# Altium PCB ldo_pcb.PcbDoc
Units mil, origin at the board's own origin, x right, y up, seen from the top; angles counter-clockwise.
Board outline 1437.01 x 393.7 mil, 2 copper layers (Top Layer, Bottom Layer); 11 components, 5 nets, 24 pads, 19 vias.
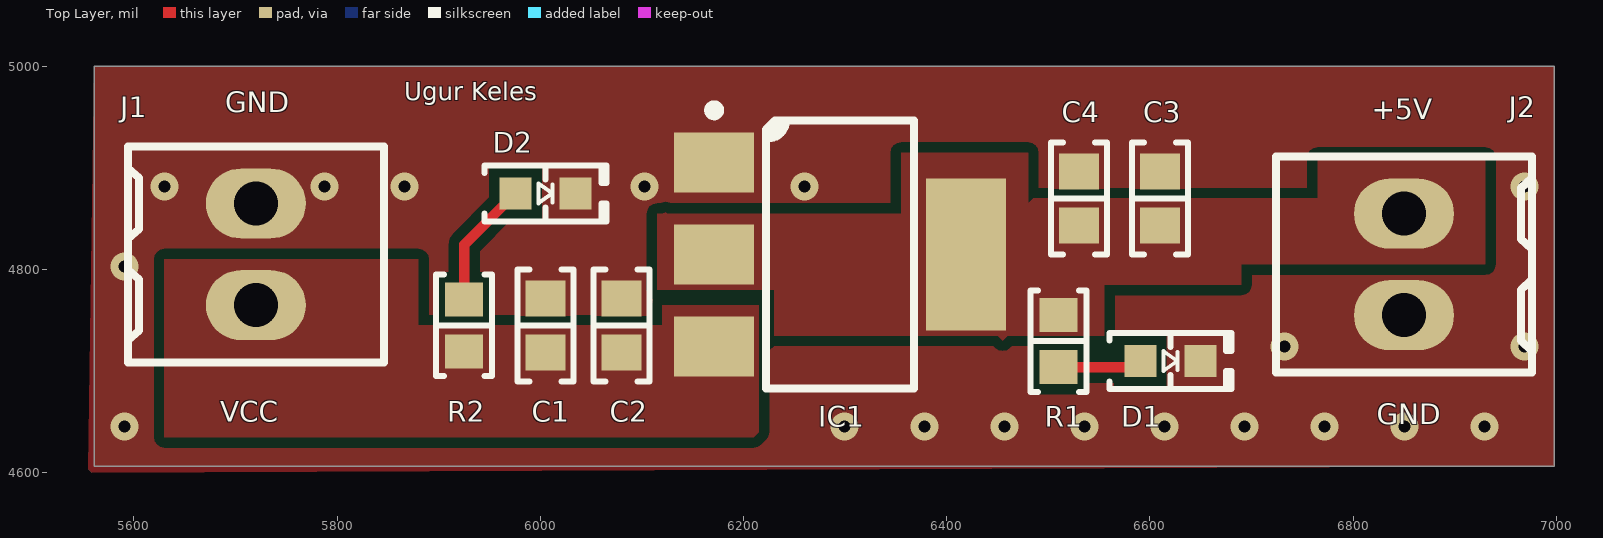
[diagram p0: Top Layer view]
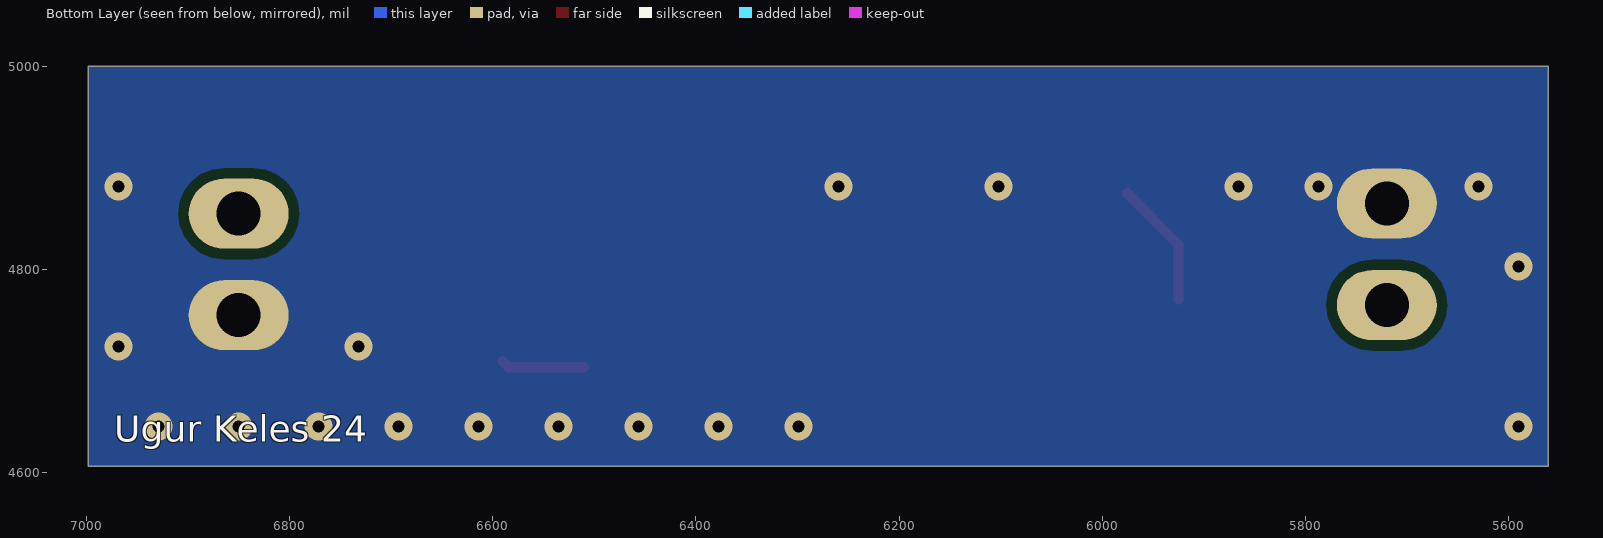
[diagram p1: Bottom Layer view, seen from below]
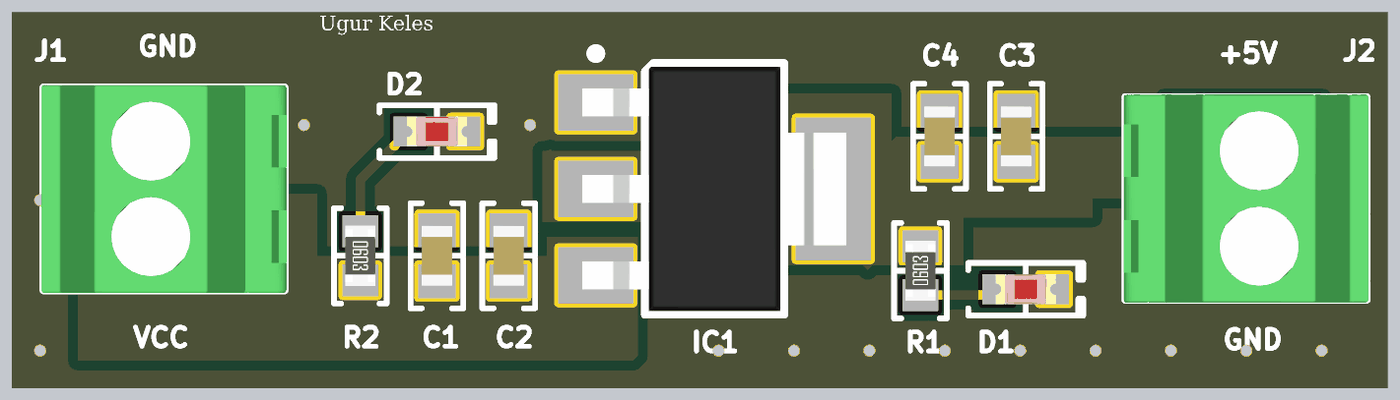
[diagram p2: 3D render of the assembled board from above, using the file's embedded part models]

## Layer stack, top to bottom
Top Solder: solder mask 0.4, Solder Resist, Dk 3.5
Top Layer: signal copper 1.4
Dielectric 1: dielectric 12.6, FR-4, Dk 4.8
Bottom Layer: signal copper 1.4
Bottom Solder: solder mask 0.4, Solder Resist, Dk 3.5

## Board outline
5561.02,4606.3 5561.02,5000 6998.03,5000 6998.03,4606.3

## Design rules (kind name [scope] priority, off if disabled: settings)
Clearance [All] p1: gap=10 ignorepadtopadclearanceinfootprint=FALSE
MinimumSolderMaskSliver [All] p1: minsoldermaskwidth=7.09
PolygonConnect [All] p1: connectstyle=Direct reliefconductorwidth=10 reliefentries=4 polygonreliefangle="90 Angle" airgapwidth=10
RoutingVias [All] p1: holewidth=28 width=50 viastyle="Through Hole" minholewidth=28 minwidth=50 maxholewidth=28 maxwidth=50
SilkToSilkClearance [All] p1: silktosilkclearance=5.91
SilkToSolderMaskClearance [IsPad] p1: minsilkscreentomaskgap=3.94 clearancetoexposedcopper=TRUE
SolderMaskExpansion [All] p1: expansion=4 istentingtop=FALSE
Width [All] p1: maxlimit=10 minlimit=10 preferedwidth=10
27 further rules are at their usual default settings.

## Components (designator, comment, footprint, x,y, rotation, side; value= is the part's Value field where it differs from the comment)
C1 "10 µF" "CAP 0603_1608" 6005,4745 r270 top
C2 "0.1 µF" "CAP 0603_1608" 6080,4745 r270 top
C3 "10 µF" "CAP 0603_1608" 6610,4870 r270 top
C4 "0.1 µF" "CAP 0603_1608" 6530,4870 r270 top
D1 "=Value" "LED 0603_1608 RED" 6620,4710 r0 top
D2 "=Value" "LED 0603_1608 RED" 6005,4875 r0 top
IC1 "LD1117S50TR" "ST SOT-223" 6295,4815 r0 top
J1 "282834-2" "TE 282834-2" 5720,4815 r90 top
J2 "282834-2" "TE 282834-2" 6850,4805 r270 top
R1 "330 Ohms" "RES 0603_1608" 6510,4729.41 r90 top
R2 "1 kOhms" "RES 0603_1608" 5925,4745 r270 top

## Footprints (in the part's own frame and the unit in brackets; to place one, negate y for a bottom-side part, rotate by r counter-clockwise, add the part's x,y. Pads: shape width x height; smd on the part's side, far side on the other; paste and mask are expansions set on the pad)
"CAP 0603_1608" [mm] "Chip Capacitor, 2-Leads, Body 1.60x0.80mm, IPC Medium Density"
  rect 0.9x1 smd: 1(-0.675,0) 2(0.675,0)
  silkscreen extent -1.4,-0.7 1.4,0.7, body extent -0.8,-0.41 0.8,0.41, height 0.82
"LED 0603_1608 RED" [mm] "Chip Diode, 2-Leads, Body 1.60x0.80mm, IPC Medium Density"
  rect 0.8x0.8 smd: 1(-0.75,0) 2(0.75,0)
  silkscreen extent -1.52,-0.7 1.52,0.7, body extent -0.8,-0.4 0.8,0.4, height 0.53
"RES 0603_1608" [mm] "Chip Resistor, 2-Leads, Body 1.60x0.80mm, IPC Medium Density"
  rect 0.85x0.95 smd: 1(-0.65,0) 2(0.65,0)
  silkscreen extent -1.27,-0.7 1.27,0.7, body extent -0.8,-0.4 0.8,0.4, height 0.45
"ST SOT-223" [mm] "SOT223, 4-Leads, Body 6.50x7.00mm (avg), Pitch 2.30mm, IPC Medium Density"
  rect 2x1.5 smd: 1(-3.15,2.3) 2(-3.15,0) 3(-3.15,-2.3)
  rect 2x3.8 smd: 4(3.15,0)
  silkscreen extent -3.27,-3.35 1.85,3.72, body extent -3.52,-3.25 3.5,3.25, height 1.8
"TE 282834-2" [mm]
  oval 1.75x2.5 hole 1.1: 1(-1.27,0) 2(1.27,0)
  silkscreen extent -2.7,-3.2 2.7,3.2, body extent -2.77,-3.25 2.77,3.25, height 10

## Part data
C1 C3: library part GRM188Z71A106MA73D, "CAP CER 10UF 10V X7R 0603", Part Number=GRM188Z71A106MA73D
C2 C4: library part 06031C104K4T2A, "CAP CER 0.1UF 100V X7R 0603", Part Number=06031C104K4T2A
D1 D2: library part APT1608SEC/J3-AMT, "LED RED 0603", Part Number=APT1608SEC/J3-AMT
IC1: "IC REG LINEAR 5V 800MA SOT223", Part Number=LD1117S50TR
J1 J2: "TERM BLK 2P SIDE ENT 2.54MM PCB", Part Number=282834-2
R1: library part AC0603FR-10330RL, "RES 330 OHM 1% 1/10W 0603", Part Number=AC0603FR-10330RL
R2: library part 3-2176366-6, "RES 1K OHM 0.1% 0.15W 0603", Part Number=3-2176366-6

## Via types
v1: diameter 27.56, hole 11.81, Top Layer to Bottom Layer, tented both sides, 19 vias

## Nets (pads, with @x,y where several pads share a name; then routed paths per layer and width w, separated by ;. In a path a pad name is that pad's centre, name@x,y a point inside that pad or via, vN(x,y) a via of type N, cw(c..) or ccw(c..) an arc to the next point about the centre after c; other vN are vias at no path point)
+5: C3.2 C4.2 IC1.2 IC1.4 J2.1 R1.2
GND: C1.1 C2.1 C3.1 C4.1 D1.2 D2.2 IC1.1 J1.2 J2.2
  other v1: 5590.55,4645.67 6299.22,4645.67 6377.96,4645.67 6456.7,4645.67 6535.44,4645.67 6614.18,4645.67 6692.92,4645.67 6771.66,4645.67 6850.4,4645.67 6929.14,4645.67 6732.29,4724.41 6968.51,4724.41 5590.55,4803.15 5629.92,4881.89 5787.4,4881.89 5866.14,4881.89 6102.37,4881.89 6259.85,4881.89 6968.51,4881.89
NetD1_1: D1.1 R1.1 | length 83
  Top Layer w10: R1.1 6584.29,4703.82 D1.1
NetD2_1: D2.1 R2.1 | length 125.3
  Top Layer w10: R2.1 5925,4824.53 D2.1
VCC: C1.2 C2.2 IC1.3 J1.1 R2.2

## Polygon pours and split planes (outlines as drawn)
GND on Top Layer "GND_L01_P003" (solid, pour order 3): 5580.71,5000 5570,5000 6998.03,5000 6998.03,4616.14 6998.03,4606.3 5555,4600 5561.02,5000 5560,5000 5590,5000
+5 on Top Layer "+5_L01_P001" (solid, pour order 1): 6120,4860 6125,4855 6355,4855 6355,4915 6480,4915 6480,4865 6485,4870 6765,4870 6765,4910 6930,4910 6930,4805 6690,4805 6690,4785 6555,4785 6555,4735 6460,4735 6455,4730 6450,4735 6230,4735 6230,4780 6115,4780 6115,4855 6120,4855
VCC on Top Layer "VCC_L01_P000" (solid, pour order 0): 5630,4810 5880,4810 5880,4745 6120,4745 6120,4765 6215,4765 6215,4640 6210,4635 5630,4635
GND on Bottom Layer "GND_L02_P002" (solid, pour order 2): 6998.03,5000 6998.03,4606.3 5561.02,4606.3 5561.02,5000

## Silkscreen, mask and mechanical layers (free items; w line width, h text height)
Top Overlay:
  text "Ugur Keles" at 5866.14,4960.63 h30
  text "GND" at 5690,4955 h20
  text "+5V" at 6818.37,4947.71 h20
  text "VCC" at 5685,4650 h20
  text "GND" at 6823.37,4647.71 h20
Bottom Overlay:
  text "Ugur Keles 24" at 6972.44,4630.71 h25.98